# Altium PCB DISPLAY_CE.PcbDoc
Units mm, origin at the board's own origin, x right, y up, seen from the top; angles counter-clockwise.
Board outline 160 x 50 mm, 2 copper layers (Top Layer, Bottom Layer), stack 1.671 mm thick; 23 components, 16 nets, 73 pads, 38 vias.
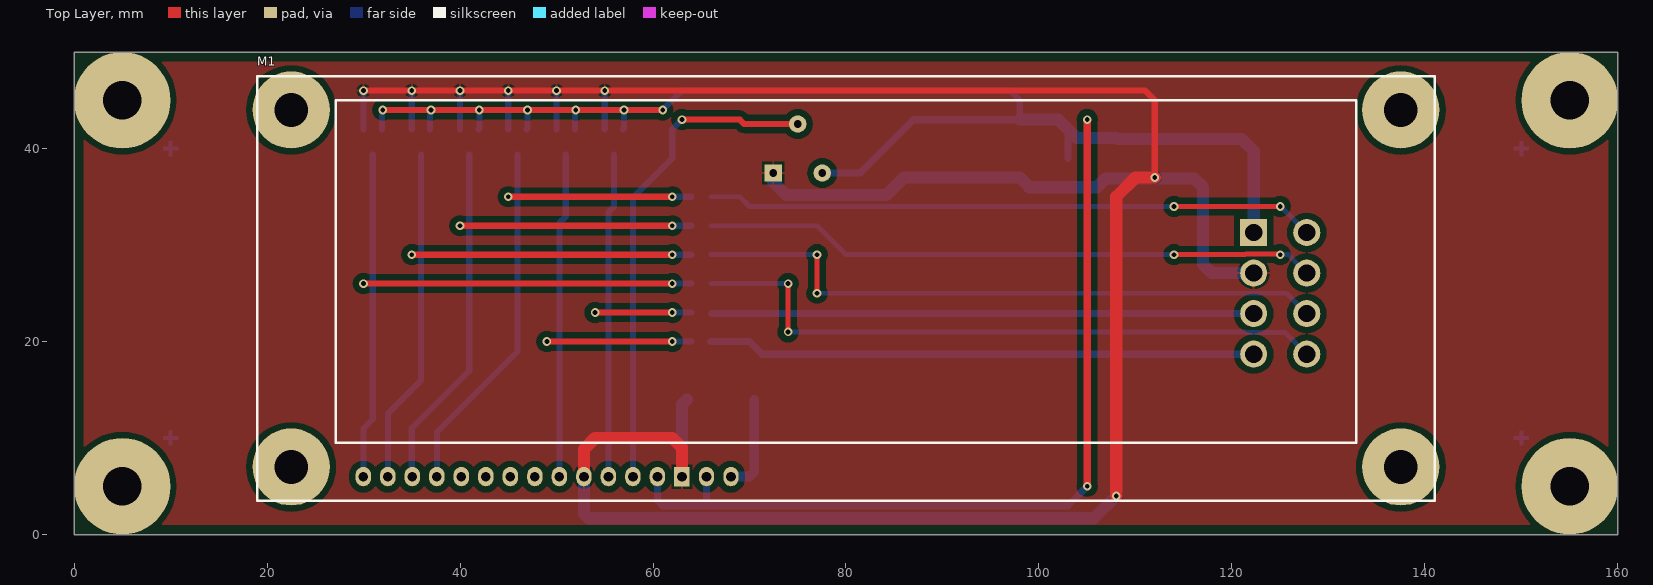
[diagram p0: Top Layer view]
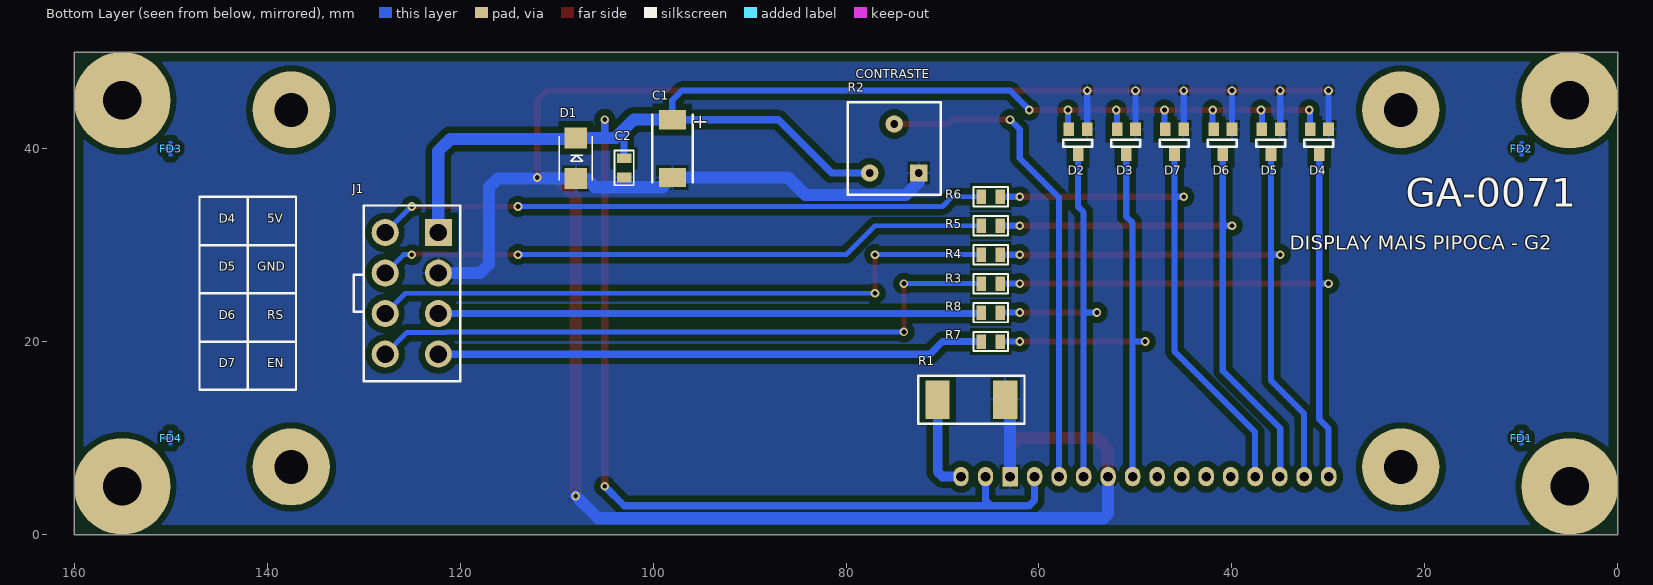
[diagram p1: Bottom Layer view, seen from below]
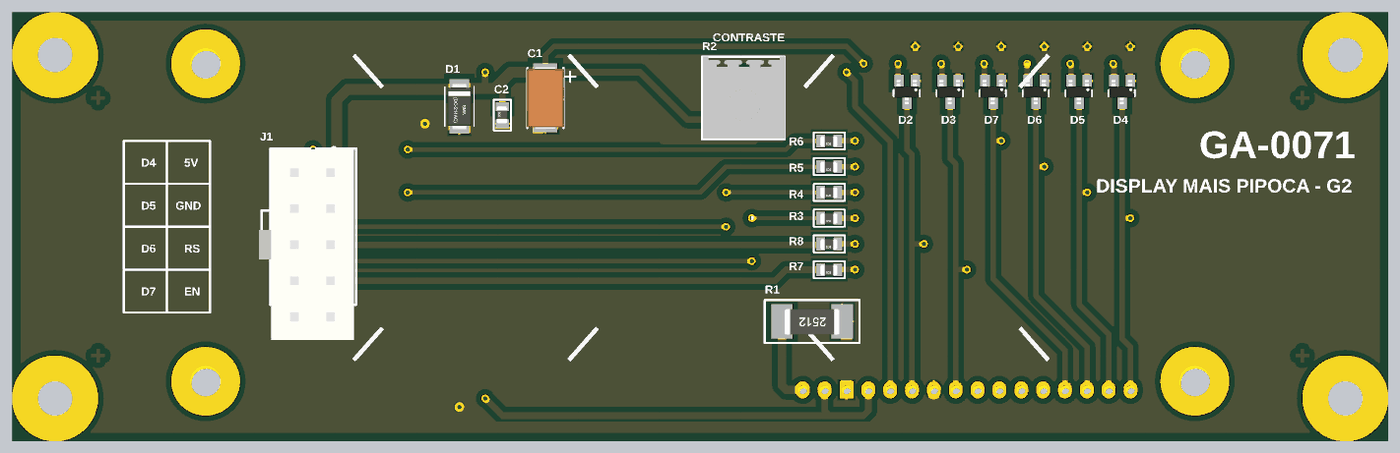
[diagram p2: 3D render of the assembled board from below, using the file's embedded part models]

## Layer stack, top to bottom
Top Solder: solder mask 0.0102, Solder Resist, Dk 3.5
Top Layer: signal copper 0.0356
Dielectric 1: dielectric 1.6, FR-4, Dk 4.8
Bottom Layer: signal copper 0.0356
Bottom Solder: solder mask 0.0102, Solder Resist, Dk 3.5

## Board outline
0,0 160,0 160,50 0,50

## Design rules (kind name [scope] priority, off if disabled: settings)
Clearance Clearance_1 [InPolygon] p1: gap=0.635
Clearance [All] p2: gap=0.305
PolygonConnect [All] p1: connectstyle=Relief reliefconductorwidth=0.254 reliefentries=4 polygonreliefangle="90 Angle" airgapwidth=0.254
RoutingVias [All] p1: holewidth=0.5 width=0.9 viastyle="Through Hole" minholewidth=0.5 minwidth=0.8 maxholewidth=0.5 maxwidth=0.9
SolderMaskExpansion [All] p1: expansion=0.102
UnpouredPolygon [All] p1: allowunpoured=FALSE
Width [All] p1: maxlimit=5.08 minlimit=0.254 preferedwidth=0.254
29 further rules are at their usual default settings.

## Components (designator, comment, footprint, x,y, rotation, side; value= is the part's Value field where it differs from the comment)
C1 "10uF/35V-tantalo" "tantalo vishay E" 98,40 r270 bottom
C2 "100nF/50V-0805" "0805-REVISADO ONDA" 103,38 r90 bottom
D1 "SMBJ5.0A" DO-214AA 108,39 r90 bottom
D2 "BAT54ST" "SOT23 - REVISADO ONDA" 55,42 r0 bottom
D3 "BAT54ST" "SOT23 - REVISADO ONDA" 50,42 r0 bottom
D4 "BAT54ST" "SOT23 - REVISADO ONDA" 30,42 r0 bottom
D5 "BAT54ST" "SOT23 - REVISADO ONDA" 35,42 r0 bottom
D6 "BAT54ST" "SOT23 - REVISADO ONDA" 40,42 r0 bottom
D7 "BAT54ST" "SOT23 - REVISADO ONDA" 45,42 r0 bottom
FD1 "FID" "FIDUCIAL CRUZ" 10,10 r180 bottom
FD2 "FID" "FIDUCIAL CRUZ" 10,40 r180 bottom
FD3 "FID" "FIDUCIAL CRUZ" 150,40 r180 bottom
FD4 "FID" "FIDUCIAL CRUZ" 150,10 r180 bottom
J1 "MFPL-08" MFPC-08 125,25 r90 bottom
M1 "WH1602L" WH1602L1 80,25 r0 top
R1 "5R6-2512-5%" "2512 - REVISADO ONDA" 63.5,13.97 r0 bottom
R2 "TRIMPOT 100K-0805-5%" "trimmer 3386" 75,40 r0 bottom
R3 "100R-0805-5%" "0805-REVISADO ONDA" 65,26 r0 bottom
R4 "100R-0805-5%" "0805-REVISADO ONDA" 65,29 r0 bottom
R5 "100R-0805-5%" "0805-REVISADO ONDA" 65,32 r0 bottom
R6 "100R-0805-5%" "0805-REVISADO ONDA" 65,35 r0 bottom
R7 "100R-0805-5%" "0805-REVISADO ONDA" 65,20 r0 bottom
R8 "100R-0805-5%" "0805-REVISADO ONDA" 65,23 r0 bottom

## Footprints (in the part's own frame and the unit in brackets; to place one, negate y for a bottom-side part, rotate by r counter-clockwise, add the part's x,y. Pads: shape width x height; smd on the part's side, far side on the other; paste and mask are expansions set on the pad)
"0805-REVISADO ONDA" [mm]
  rect 1x1.5 smd: 1(-1,0) 2(1,0)
  silkscreen extent -1.8,-1 1.8,1, body extent -0.96,-0.58 1.04,0.67, height 0.78
"2512 - REVISADO ONDA" [mm]
  rect 2.5x4 smd: 1(0,0) 2(7,0)
  silkscreen extent -2,-2.5 9,2.5, body extent 0.33,-1.45 6.68,1.55, height 1.6
DO-214AA [mm] "SMBJ LITTELFUSE"
  rect 2.15x2.3 smd: 1(-2.1,0) 2(2.1,0)
  silkscreen extent -2.3,-1.7 2.3,1.7, body extent -2.75,-1.4 2.75,1.4, height 2.6
"FIDUCIAL CRUZ" [mm]
  Top Layer region: -0.2,0.8 0.2,0.8 0.2,-0.8 -0.2,-0.8
  Top Layer region: -0.8,0.2 0.8,0.2 0.8,-0.2 -0.8,-0.2
MFPC-08 [mm]
  rect 2.8x2.8 hole 1.8: 1(6.3,-2.75)
  round 2.8 hole 1.8: 2(2.1,-2.75) 3(-2.1,-2.75) 4(-6.3,-2.75) 5(6.3,2.75) 6(2.1,2.75) 7(-2.1,2.75) 8(-6.3,2.75)
  silkscreen extent -9.1,-5 9.1,6, body extent -13.19,-4.72 9.41,6.28, height 12.8
"SOT23 - REVISADO ONDA" [mm]
  rect 1.1x1.4 smd: 1(0,0) 2(1.9,0) 3(0.95,2.6)
  silkscreen extent -0.5,1.1 2.5,1.8, body extent -0.45,-0.1 2.45,2.7, height 1.3
"tantalo vishay E" [mm]
  rect 2x2.8 smd: 1(-3,0) 2(3,0)
  silkscreen extent -3.5,-2.1 3.5,2.1, body extent -3.57,-2.15 3.57,2.15, height 2.8
"trimmer 3386" [mm]
  rect 1.8x1.8 hole 0.8: 1(-2.54,2.54)
  round 1.8 hole 0.8: 2(0,-2.54) 3(2.54,2.54)
  silkscreen extent -4.8,-4.8 4.8,4.8, body extent -4.89,-4.84 4.69,4.74, height 5
WH1602L1 [mm]
  rect 1.6x2 hole 1: 1(-17,-19)
  oval 1.6x2 hole 1: 2(-19.54,-19) 3(-22.08,-19) 4(-24.62,-19) 5(-27.16,-19) 6(-29.7,-19) 7(-32.24,-19) 8(-34.78,-19) 9(-37.32,-19) 10(-39.86,-19) 11(-42.4,-19) 12(-44.94,-19) 13(-47.48,-19) 14(-50.02,-19) 15(-14.46,-19) 16(-11.92,-19)
  round 8 hole 3.5: ""(-57.5,-18) ""(-57.5,19) ""(57.5,-18) ""(57.5,19)
  silkscreen extent -61,-21.5 61,22.5, body extent -61.1,-21.77 60.9,22.23, height 11.1

## Part data
C2: library part 100nF/50-0805-NPO
FD1 FD2 FD3 FD4: library part FIDUCIAL
R1: library part 5R6-2512-1%
R2: library part "TRIMPOT 10K-3386"

## Free pads (board coordinates)
  round 10 hole 4: ""(5,5) ""(5,45) ""(155,5) ""(155,45)

## Via types
v1: diameter 0.9, hole 0.5, Top Layer to Bottom Layer, 38 vias

## Nets (pads, with @x,y where several pads share a name; then routed paths per layer and width w, separated by ;. In a path a pad name is that pad's centre, name@x,y a point inside that pad or via, vN(x,y) a via of type N, cw(c..) or ccw(c..) an arc to the next point about the centre after c; other vN are vias at no path point)
5V: C1.1 C2.2 D1.2 D2.2 D3.2 D4.2 D5.2 D6.2 D7.2 J1.1 M1.2 M1.15 R2.3 | length 232.5
  Top Layer w0.635: v1(32,44) v1(37,44) v1(42,44) v1(47,44) v1(52,44) v1(57,44) v1(61,44)
  Top Layer w0.762: v1(105,5) v1(105,43)
  Bottom Layer w0.635: D4.2 31.9,43.9 v1(32,44) ; D5.2 36.9,43.9 v1(37,44) ; D6.2 42,42.1 v1(42,44) ; D7.2 47,42.1 v1(47,44) ; D3.2 51.9,43.9 v1(52,44) ; D2.2 57,42.1 v1(57,44) ; v1(61,44) 63,46 97,46 98,45 C1.1
  Bottom Layer w0.762: M1.2 60.46,3.54 61,3 65,3 ; M1.15 65.54,3.54 65,3 ; R2.3 81.46,37.46 87,43 C1.1 ; C2.2 103,42 ; v1(105,5) 103,3 65,3 ; 105,41.1 v1(105,43)
  Bottom Layer w1.27: C1.1 102,43 103,42 103.9,41.1 105,41.1 D1.2 108.1,41 121,41 122.25,39.75 J1.1
GND: C1.2 C2.1 D1.1 D2.1 D3.1 D4.1 D5.1 D6.1 D7.1 J1.2 M1.1 M1.5 R1.1 R2.1 | length 297
  Top Layer w0.635: v1(30,46) v1(35,46) v1(40,46) v1(45,46) v1(50,46) v1(55,46) 111,46 112,45 v1(112,37)
  Top Layer w1.27: M1.5 52.84,8.84 54,10 62,10 63,9 M1.1 ; v1(108,4) 108,35 110,37 v1(112,37)
  Bottom Layer w0.635: D4.1 v1(30,46) ; D5.1 v1(35,46) ; D6.1 v1(40,46) ; D7.1 v1(45,46) ; D3.1 v1(50,46) ; D2.1 v1(55,46)
  Bottom Layer w1.27: M1.5 52.84,2.16 53.321,1.679 105.679,1.679 v1(108,4) ; M1.1 63,13.47 R1.1 ; R2.1 72.46,36.54 73.806,35.194 84.194,35.194 86,37 C1.2 99,36 106,36 106.9,36.9 D1.1 116.1,36.9 117,36 117,28 117.9,27.1 J1.2
NetD2_3: D2.3 M1.4 R8.1 | length 44.6
  Top Layer w0.635: v1(54,23) v1(62,23)
  Bottom Layer w0.635: v1(54,23) 55,23 ; M1.4 55.38,33.38 55.95,33.95 D2.3 ; v1(62,23) R8.1
NetD3_3: D3.3 M1.6 R7.1 | length 50
  Top Layer w0.635: v1(49,20) v1(62,20)
  Bottom Layer w0.635: v1(49,20) 50.3,20 ; M1.6 50.3,20 ; D3.3 50.95,32.95 50.3,32.3 50.3,20 ; v1(62,20) R7.1
NetD4_3: D4.3 M1.14 R3.1 | length 68.8
  Top Layer w0.635: v1(30,26) v1(62,26)
  Bottom Layer w0.635: M1.14 30,6.02 30,11 30.95,11.95 30.95,26 ; v1(30,26) 30.95,26 ; D4.3 30.95,26 ; v1(62,26) R3.1
NetD5_3: D5.3 M1.13 R4.1 | length 64.8
  Top Layer w0.635: v1(35,29) v1(62,29)
  Bottom Layer w0.635: M1.13 32.52,12.52 35.95,15.95 35.95,29 ; v1(35,29) 35.95,29 ; D5.3 35.95,29 ; v1(62,29) R4.1
NetD6_3: D6.3 M1.12 R5.1 | length 60.8
  Top Layer w0.635: v1(40,32) v1(62,32)
  Bottom Layer w0.635: M1.12 35,6.06 35,11 40.95,16.95 40.95,32 ; v1(40,32) 40.95,32 ; D6.3 40.95,32 ; v1(62,32) R5.1
NetD7_3: D7.3 M1.11 R6.1 | length 56.8
  Top Layer w0.635: v1(45,35) v1(62,35)
  Bottom Layer w0.635: M1.11 37.6,10.6 45.95,18.95 45.95,35 ; v1(45,35) 45.95,35 ; D7.3 45.95,35 ; v1(62,35) R6.1
NetJ1_3: J1.3 R8.2 | length 56.1
  Bottom Layer w0.762: R8.2@66.1,22.9 J1.3
NetJ1_4: J1.4 R7.2 | length 56.8
  Bottom Layer w0.762: R7.2 70,20 71.3,18.7 J1.4
NetJ1_5: J1.5 R6.2 | length 63.3
  Top Layer w0.508: v1(114,34) v1(125,34)
  Bottom Layer w0.508: R6.2 69,35 70,34 v1(114,34) ; v1(125,34) 125.05,34 J1.5
NetJ1_6: J1.6 R5.2 | length 63.8
  Top Layer w0.508: v1(114,29) 121.38,29 121.439,29.059 124.941,29.059 v1(125,29)
  Bottom Layer w0.508: R5.2 77,32 80,29 v1(114,29) ; v1(125,29) 125.85,29 J1.6
NetJ1_7: J1.7 R4.2 | length 66.6
  Top Layer w0.508: v1(77,25) v1(77,29)
  Bottom Layer w0.508: R4.2 v1(77,29) ; v1(77,25) 125.65,25 J1.7
NetJ1_8: J1.8 R3.2 | length 67.7
  Top Layer w0.508: v1(74,21) v1(74,26)
  Bottom Layer w0.508: R3.2 v1(74,26) ; v1(74,21) 121.38,21 121.439,20.941 125.509,20.941 J1.8
NetM1_3: M1.3 R2.2 | length 51.3
  Top Layer w0.635: v1(63,43) 69,43 69.46,42.54 R2.2
  Bottom Layer w0.635: M1.3 57.92,34.92 62,39 62,42 v1(63,43)
NetM1_16: M1.16 R1.2 | length 10.1
  Bottom Layer w1.016: M1.16 70,6 70.5,6.5 R1.2
pads on no net: M1. M1.7 M1.8 M1.9 M1.10

## Polygon pours and split planes (outlines as drawn)
GND on Bottom Layer "Bottom Layer-No Net" (solid, pour order 4): 1,1 1,49 159,49 159,1
GND on Top Layer "Bottom Layer-No Net" (solid, pour order 6): 1,1 1,49 159,49 159,1

## Silkscreen, mask and mechanical layers (free items; w line width, h text height)
Bottom Overlay:
  lines w0.254: 137,15 142,15 ; 137,15 142,15 ; 137,15 137,20 ; 137,20 142,20 ; 137,20 142,20 ; 137,20 137,25 ; 137,25 142,25 ; 137,25 137,30 ; 137,25 142,25 ; 137,30 142,30 ; 137,30 137,35 142,35 ; 137,30 142,30 ; 142,15 147,15 ; 142,15 147,15 ; 142,15 142,20 ; 142,15 142,20 ; 142,20 147,20 ; 142,20 147,20 ; 142,20 142,25 ; 142,20 142,25 ; 142,25 147,25 ; 142,25 147,25 ; 142,25 142,30 ; 142,25 142,30 ; 142,30 147,30 ; 142,30 142,35 ; 142,30 142,35 ; 142,30 147,30 ; 142,35 147,35 147,30 ; 147,15 147,20 ; 147,20 147,25 ; 147,25 147,30
  text "CONTRASTE" at 79,47 h1.52
  text "GA-0071" at 22,33 h5.08
  text "5V" at 140,32 h1.52
  text "D4" at 145,32 h1.52
  text "DISPLAY MAIS PIPOCA - G2" at 34,29 h2.54
  text "GND" at 141,27 h1.52
  text "D5" at 145,27 h1.52
  text "RS" at 140,22 h1.52
  text "D6" at 145,22 h1.52
  text "EN" at 140,17 h1.52
  text "D7" at 145,17 h1.52
Mechanical 1:
  the board outline again, w0.254

## Text inside footprints (layer, text, board x,y; h text height)
C1: Bottom Overlay "+" at 95.714,43.581 h1.52 r90